# Allegro board newBoardNetEdit.brd
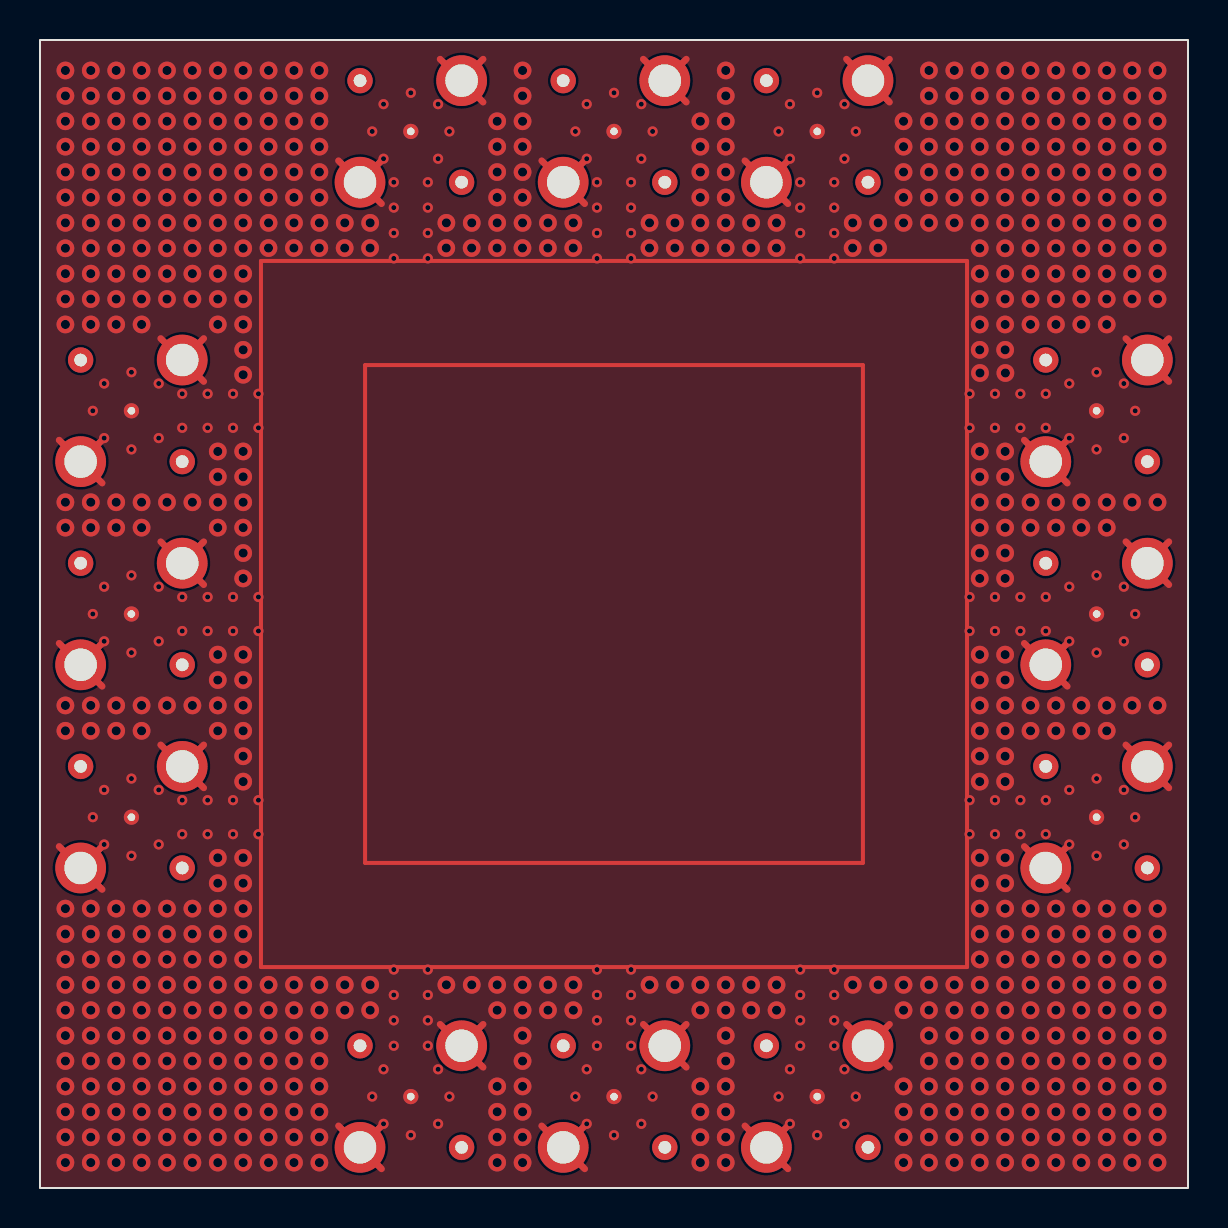
[diagram p0: board, top side]
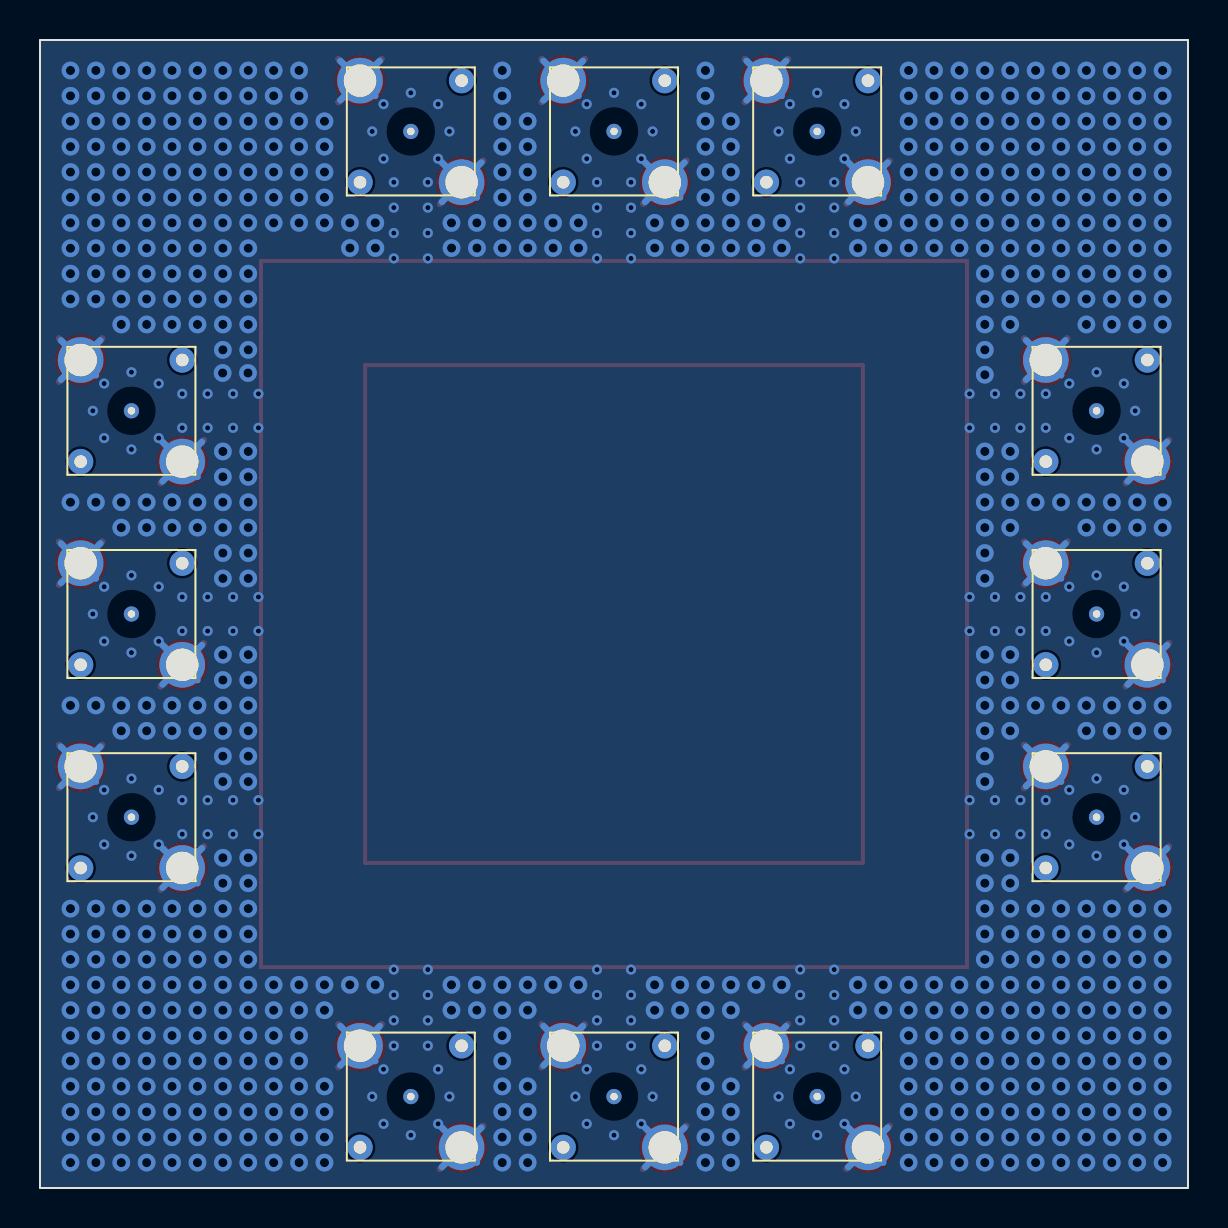
[diagram p1: board, bottom side, seen from below]

Outline 57.4 x 57.4 mm; copper layers: TOP, 02_GND, 03_SIG, BOTTOM. Coordinates in mm from the lower left corner of the outline.
Outline path: rectangle 0,0 57.4,57.4

## Placement (name value [footprint] x y rotation side)
J1  -  [SSMA_BB]  28.7 52.83 180 bottom
J2  -  [SSMA_BB]  38.86 52.83 180 bottom
J3  -  [SSMA_BB]  52.83 38.86 180 bottom
J4  -  [SSMA_BB]  52.83 28.7 180 bottom
J5  -  [SSMA_BB]  52.83 18.54 180 bottom
J6  -  [SSMA_BB]  38.86 4.57 180 bottom
J7  -  [SSMA_BB]  28.7 4.57 180 bottom
J8  -  [SSMA_BB]  18.54 4.57 180 bottom
J9  -  [SSMA_BB]  4.57 18.54 180 bottom
J10  -  [SSMA_BB]  4.57 28.7 180 bottom
J11  -  [SSMA_BB]  4.57 38.86 180 bottom
J12  -  [SSMA_BB]  18.54 52.83 180 bottom

## Library data of the parts
J1-J12 = SSMA_BB

## Footprints (pads in the part's own frame, mm; a bottom-side part is the same pattern mirrored in y, then rotated)
SSMA_BB
  round 1.27 hole 0.635: (-2.54,-2.54) (2.54,2.54)
  round 0.762 hole 0.381: 1(0,0)
  round 2.54 hole 1.626: 2(-2.54,2.54) 3(2.54,-2.54)

## Nets
GND: J1.2(TP-2) J1.3(TP-3) J2.2(TP-2) J2.3(TP-3) J3.2(TP-2) J3.3(TP-3) J4.2(TP-2) J4.3(TP-3) J5.2(TP-2) J5.3(TP-3) J6.2(TP-2) J6.3(TP-3) J7.2(TP-2) J7.3(TP-3) J8.2(TP-2) J8.3(TP-3) J9.2(TP-2) J9.3(TP-3) J10.2(TP-2) J10.3(TP-3) J11.2(TP-2) J11.3(TP-3) J12.2(TP-2) J12.3(TP-3)
MICROWAVE: J1.1(TP-1) J2.1(TP-1) J3.1(TP-1) J4.1(TP-1) J5.1(TP-1) J6.1(TP-1) J7.1(TP-1) J8.1(TP-1) J9.1(TP-1) J10.1(TP-1) J11.1(TP-1) J12.1(TP-1)

## Via types
v1: diameter 0.889, hole 0.457, TOP to BOTTOM, 633 vias
v2: diameter 0.508, hole 0.254, TOP to BOTTOM, 180 vias

## Routing (per net, layer and track width the routed paths; a pad name or vN(x,y) marks a point on that pad's centre or on a via; arc(x,y) is an arc through that point)
GND: length 387.6
  TOP w0.33: 54.61,20.32 J5.2 ; J5.2 56.45,20.01 ; J5.2 54.3,22.16 ; J5.2 56.45,22.16 ; 1.27,15.24 J9.3 ; J9.3 3.11,17.08 ; J9.3 3.11,14.93 ; J9.3 0.96,17.08 ; 56.45,32.32 J4.2 ; J4.2 54.61,30.48 ; J4.2 56.45,30.17 ; J4.2 54.3,32.32 ; 6.04,32.32 J10.2 ; J10.2 8.19,30.17 ; J10.2 6.35,30.48 ; J10.2 8.19,32.32 ; 15.24,1.27 J8.3 ; J8.3 14.93,3.11 ; J8.3 17.08,3.11 ; J8.3 17.08,0.96 ; 14.93,51.37 J12.3 ; J12.3 17.08,49.22 ; J12.3 15.24,49.53 ; J12.3 17.08,51.37 ; J3.3 51.37,35.25 ; J3.3 49.53,35.56 ; J3.3 51.37,37.4 ; J3.3 49.22,37.4 ; 30.17,56.45 J1.2 ; J1.2 30.48,54.61 ; J1.2 32.32,56.45 ; J1.2 32.32,54.3 ; 30.17,8.19 J7.2 ; J7.2 30.48,6.35 ; J7.2 32.32,6.04 ; J7.2 32.32,8.19 ; 8.19,42.48 J11.2 ; J11.2 6.04,42.48 ; J11.2 6.35,40.64 ; J11.2 8.19,40.33 ; 42.48,56.45 J2.2 ; J2.2 42.48,54.3 ; J2.2 40.33,56.45 ; J2.2 40.64,54.61 ; 27.24,3.11 J7.3 ; J7.3 25.4,1.27 ; J7.3 25.09,3.11 ; J7.3 27.24,0.96 ; 51.37,17.08 J5.3 ; J5.3 49.53,15.24 ; J5.3 49.22,17.08 ; J5.3 51.37,14.93 ; 6.35,20.32 J9.2 ; J9.2 8.19,20.01 ; J9.2 8.19,22.16 ; J9.2 6.04,22.16 ; 0.96,37.4 J11.3 ; J11.3 1.27,35.56 ; J11.3 3.11,35.25 ; J11.3 3.11,37.4 ; 35.25,3.11 J6.3 ; J6.3 37.4,3.11 ; J6.3 35.56,1.27 ; J6.3 37.4,0.96 ; 35.56,49.53 J2.3 ; J2.3 37.4,51.37 ; J2.3 37.4,49.22 ; J2.3 35.25,51.37 ; 20.32,54.61 J12.2 ; J12.2 20.01,56.45 ; J12.2 22.16,56.45 ; J12.2 22.16,54.3 ; 1.27,25.4 J10.3 ; J10.3 3.11,25.09 ; J10.3 3.11,27.24 ; J10.3 0.96,27.24 ; 20.01,8.19 J8.2 ; J8.2 22.16,6.04 ; J8.2 20.32,6.35 ; J8.2 22.16,8.19 ; 49.22,27.24 J4.3 ; J4.3 49.53,25.4 ; J4.3 51.37,25.09 ; J4.3 51.37,27.24 ; J6.2 42.48,6.04 ; J6.2 42.48,8.19 ; J6.2 40.33,8.19 ; J6.2 40.64,6.35 ; 54.3,42.48 J3.2 ; J3.2 54.61,40.64 ; J3.2 56.45,40.33 ; J3.2 56.45,42.48 ; 25.09,51.37 J1.3 ; J1.3 27.24,51.37 ; J1.3 25.4,49.53 ; J1.3 27.24,49.22
  03_SIG w0.33: J11.2 8.1,40.42 ; J11.2 6.13,42.39 ; J11.2 6.35,40.64 ; J11.2 8.1,42.39 ; 1.05,27.15 J10.3 ; J10.3 1.27,25.4 ; J10.3 3.02,27.15 ; J10.3 3.02,25.18 ; 54.61,40.64 J3.2 ; J3.2 56.36,40.42 ; J3.2 54.39,42.39 ; J3.2 56.36,42.39 ; 1.05,37.31 J11.3 ; J11.3 3.02,37.31 ; J11.3 3.02,35.34 ; J11.3 1.27,35.56 ; 6.35,30.48 J10.2 ; J10.2 8.1,30.26 ; J10.2 8.1,32.23 ; J10.2 6.13,32.23 ; 25.4,49.53 J1.3 ; J1.3 27.15,51.28 ; J1.3 25.18,51.28 ; J1.3 27.15,49.31 ; J1.2 32.23,54.39 ; J1.2 30.48,54.61 ; J1.2 30.26,56.36 ; J1.2 32.23,56.36 ; 30.48,6.35 J7.2 ; J7.2 30.26,8.1 ; J7.2 32.23,8.1 ; J7.2 32.23,6.13 ; 35.34,51.28 J2.3 ; J2.3 37.31,51.28 ; J2.3 37.31,49.31 ; J2.3 35.56,49.53 ; 15.02,51.28 J12.3 ; J12.3 15.24,49.53 ; J12.3 16.99,51.28 ; J12.3 16.99,49.31 ; 20.32,54.61 J12.2 ; J12.2 20.1,56.36 ; J12.2 22.07,54.39 ; J12.2 22.07,56.36 ; J6.3 37.31,1.05 ; J6.3 35.56,1.27 ; J6.3 35.34,3.02 ; J6.3 37.31,3.02 ; 54.39,22.07 J5.2 ; J5.2 54.61,20.32 ; J5.2 56.36,20.1 ; J5.2 56.36,22.07 ; 40.64,54.61 J2.2 ; J2.2 42.39,56.36 ; J2.2 42.39,54.39 ; J2.2 40.42,56.36 ; 8.1,22.07 J9.2 ; J9.2 6.13,22.07 ; J9.2 6.35,20.32 ; J9.2 8.1,20.1 ; J4.2 56.36,30.26 ; J4.2 54.61,30.48 ; J4.2 54.39,32.23 ; J4.2 56.36,32.23 ; 15.02,3.02 J8.3 ; J8.3 16.99,3.02 ; J8.3 16.99,1.05 ; J8.3 15.24,1.27 ; J6.2 42.39,6.13 ; J6.2 40.64,6.35 ; J6.2 40.42,8.1 ; J6.2 42.39,8.1 ; J5.3 51.28,15.02 ; J5.3 49.53,15.24 ; J5.3 49.31,16.99 ; J5.3 51.28,16.99 ; J4.3 51.28,25.18 ; J4.3 51.28,27.15 ; J4.3 49.31,27.15 ; J4.3 49.53,25.4 ; 22.07,8.1 J8.2 ; J8.2 22.07,6.13 ; J8.2 20.1,8.1 ; J8.2 20.32,6.35 ; 1.05,16.99 J9.3 ; J9.3 3.02,15.02 ; J9.3 3.02,16.99 ; J9.3 1.27,15.24 ; 51.28,37.31 J3.3 ; J3.3 51.28,35.34 ; J3.3 49.53,35.56 ; J3.3 49.31,37.31 ; 25.18,3.02 J7.3 ; J7.3 27.15,1.05 ; J7.3 25.4,1.27 ; J7.3 27.15,3.02
  BOTTOM w0.33: 54.61,30.48 J4.2 ; J4.2 56.36,32.23 ; J4.2 56.36,30.26 ; J4.2 54.39,32.23 ; 6.35,40.64 J11.2 ; J11.2 8.1,42.39 ; J11.2 8.1,40.42 ; J11.2 6.13,42.39 ; 49.53,25.4 J4.3 ; J4.3 51.28,25.18 ; J4.3 49.31,27.15 ; J4.3 51.28,27.15 ; 1.27,25.4 J10.3 ; J10.3 1.05,27.15 ; J10.3 3.02,25.18 ; J10.3 3.02,27.15 ; J11.3 3.02,35.34 ; J11.3 3.02,37.31 ; J11.3 1.27,35.56 ; J11.3 1.05,37.31 ; 6.35,20.32 J9.2 ; J9.2 8.1,20.1 ; J9.2 6.13,22.07 ; J9.2 8.1,22.07 ; 15.24,49.53 J12.3 ; J12.3 16.99,49.31 ; J12.3 16.99,51.28 ; J12.3 15.02,51.28 ; J10.2 8.1,30.26 ; J10.2 8.1,32.23 ; J10.2 6.13,32.23 ; J10.2 6.35,30.48 ; 42.39,8.1 J6.2 ; J6.2 40.64,6.35 ; J6.2 42.39,6.13 ; J6.2 40.42,8.1 ; J12.2 22.07,54.39 ; J12.2 20.32,54.61 ; J12.2 22.07,56.36 ; J12.2 20.1,56.36 ; 25.4,1.27 J7.3 ; J7.3 27.15,1.05 ; J7.3 25.18,3.02 ; J7.3 27.15,3.02 ; 49.31,37.31 J3.3 ; J3.3 49.53,35.56 ; J3.3 51.28,37.31 ; J3.3 51.28,35.34 ; 40.64,54.61 J2.2 ; J2.2 40.42,56.36 ; J2.2 42.39,56.36 ; J2.2 42.39,54.39 ; J2.3 37.31,49.31 ; J2.3 37.31,51.28 ; J2.3 35.56,49.53 ; J2.3 35.34,51.28 ; 49.31,16.99 J5.3 ; J5.3 51.28,15.02 ; J5.3 49.53,15.24 ; J5.3 51.28,16.99 ; J8.2 22.07,6.13 ; J8.2 22.07,8.1 ; J8.2 20.1,8.1 ; J8.2 20.32,6.35 ; J3.2 56.36,40.42 ; J3.2 54.61,40.64 ; J3.2 54.39,42.39 ; J3.2 56.36,42.39 ; 1.27,15.24 J9.3 ; J9.3 3.02,15.02 ; J9.3 1.05,16.99 ; J9.3 3.02,16.99 ; 37.31,3.02 J6.3 ; J6.3 37.31,1.05 ; J6.3 35.56,1.27 ; J6.3 35.34,3.02 ; 16.99,3.02 J8.3 ; J8.3 15.02,3.02 ; J8.3 15.24,1.27 ; J8.3 16.99,1.05 ; J5.2 56.36,20.1 ; J5.2 54.61,20.32 ; J5.2 54.39,22.07 ; J5.2 56.36,22.07 ; 30.26,8.1 J7.2 ; J7.2 32.23,6.13 ; J7.2 30.48,6.35 ; J7.2 32.23,8.1 ; 30.48,54.61 J1.2 ; J1.2 32.23,54.39 ; J1.2 30.26,56.36 ; J1.2 32.23,56.36 ; 25.4,49.53 J1.3 ; J1.3 25.18,51.28 ; J1.3 27.15,49.31 ; J1.3 27.15,51.28
  vias: v1(1.27,55.88) v1(1.27,54.61) v1(1.27,53.34) v1(1.27,52.07) v1(1.27,50.8) v1(1.27,49.53) v1(1.27,48.26) v1(1.27,46.99) v1(1.27,45.72) v1(1.27,44.45) v1(1.27,43.18) v1(1.27,34.29) v1(1.27,33.02) v1(1.27,24.13) v1(1.27,22.86) v1(1.27,13.97) v1(1.27,12.7) v1(1.27,11.43) v1(1.27,10.16) v1(1.27,8.89) v1(1.27,7.62) v1(1.27,6.35) v1(1.27,5.08) v1(1.27,3.81) v1(1.27,2.54) v1(1.27,1.27) v1(2.54,55.88) v1(2.54,54.61) v1(2.54,53.34) v1(2.54,52.07) v1(2.54,50.8) v1(2.54,49.53) v1(2.54,48.26) v1(2.54,46.99) v1(2.54,45.72) v1(2.54,44.45) v1(2.54,43.18) v1(2.54,34.29) v1(2.54,33.02) v1(2.54,24.13) v1(2.54,22.86) v1(2.54,13.97) v1(2.54,12.7) v1(2.54,11.43) v1(2.54,10.16) v1(2.54,8.89) v1(2.54,7.62) v1(2.54,6.35) v1(2.54,5.08) v1(2.54,3.81) v1(2.54,2.54) v1(2.54,1.27) v1(3.81,55.88) v1(3.81,54.61) v1(3.81,53.34) v1(3.81,52.07) v1(3.81,50.8) v1(3.81,49.53) v1(3.81,48.26) v1(3.81,46.99) v1(3.81,45.72) v1(3.81,44.45) v1(3.81,43.18) v1(3.81,34.29) v1(3.81,33.02) v1(3.81,24.13) v1(3.81,22.86) v1(3.81,13.97) v1(3.81,12.7) v1(3.81,11.43) v1(3.81,10.16) v1(3.81,8.89) v1(3.81,7.62) v1(3.81,6.35) v1(3.81,5.08) v1(3.81,3.81) v1(3.81,2.54) v1(3.81,1.27) v1(5.08,55.88) v1(5.08,54.61) v1(5.08,53.34) v1(5.08,52.07) v1(5.08,50.8) v1(5.08,49.53) v1(5.08,48.26) v1(5.08,46.99) v1(5.08,45.72) v1(5.08,44.45) v1(5.08,43.18) v1(5.08,34.29) v1(5.08,33.02) v1(5.08,24.13) v1(5.08,22.86) v1(5.08,13.97) v1(5.08,12.7) v1(5.08,11.43) v1(5.08,10.16) v1(5.08,8.89) v1(5.08,7.62) v1(5.08,6.35) v1(5.08,5.08) v1(5.08,3.81) v1(5.08,2.54) v1(5.08,1.27) v1(6.35,55.88) v1(6.35,54.61) v1(6.35,53.34) v1(6.35,52.07) v1(6.35,50.8) v1(6.35,49.53) v1(6.35,48.26) v1(6.35,46.99) v1(6.35,45.72) v1(6.35,44.45) v1(6.35,34.29) v1(6.35,24.13) v1(6.35,13.97) v1(6.35,12.7) v1(6.35,11.43) v1(6.35,10.16) v1(6.35,8.89) v1(6.35,7.62) v1(6.35,6.35) v1(6.35,5.08) v1(6.35,3.81) v1(6.35,2.54) v1(6.35,1.27) v1(7.62,55.88) v1(7.62,54.61) v1(7.62,53.34) v1(7.62,52.07) v1(7.62,50.8) v1(7.62,49.53) v1(7.62,48.26) v1(7.62,46.99) v1(7.62,45.72) v1(7.62,44.45) v1(7.62,34.29) v1(7.62,24.13) v1(7.62,13.97) v1(7.62,12.7) v1(7.62,11.43) v1(7.62,10.16) v1(7.62,8.89) v1(7.62,7.62) v1(7.62,6.35) v1(7.62,5.08) v1(7.62,3.81) v1(7.62,2.54) v1(7.62,1.27) v1(8.89,55.88) v1(8.89,54.61) v1(8.89,53.34) v1(8.89,52.07) v1(8.89,50.8) v1(8.89,49.53) v1(8.89,48.26) v1(8.89,46.99) v1(8.89,45.72) v1(8.89,44.45) v1(8.89,43.18) v1(8.89,36.83) v1(8.89,35.56) v1(8.89,34.29) v1(8.89,33.02) v1(8.89,26.67) v1(8.89,25.4) v1(8.89,24.13) v1(8.89,22.86) v1(8.89,16.51) v1(8.89,15.24) v1(8.89,13.97) v1(8.89,12.7) v1(8.89,11.43) v1(8.89,10.16) v1(8.89,8.89) v1(8.89,7.62) v1(8.89,6.35) v1(8.89,5.08) v1(8.89,3.81) v1(8.89,2.54) v1(8.89,1.27) v1(10.16,55.88) v1(10.16,54.61) v1(10.16,53.34) v1(10.16,52.07) v1(10.16,50.8) v1(10.16,49.53) v1(10.16,48.26) v1(10.16,46.99) v1(10.16,45.72) v1(10.16,44.45) v1(10.16,43.18) v1(10.16,41.91) v1(10.16,40.67) v1(10.16,36.83) v1(10.16,35.56) v1(10.16,34.29) v1(10.16,33.02) v1(10.16,31.75) v1(10.16,30.48) v1(10.16,26.67) v1(10.16,25.4) v1(10.16,24.13) v1(10.16,22.86) v1(10.16,21.59) v1(10.16,20.32) v1(10.16,16.51) v1(10.16,15.24) v1(10.16,13.97) v1(10.16,12.7) v1(10.16,11.43) v1(10.16,10.16) v1(10.16,8.89) v1(10.16,7.62) v1(10.16,6.35) v1(10.16,5.08) v1(10.16,3.81) v1(10.16,2.54) v1(10.16,1.27) v1(11.43,55.88) v1(11.43,54.61) v1(11.43,53.34) v1(11.43,52.07) v1(11.43,50.8) v1(11.43,49.53) v1(11.43,48.26) v1(11.42,47) v1(11.43,10.16) v1(11.43,8.89) v1(11.43,7.62) v1(11.43,6.35) v1(11.43,5.08) v1(11.43,3.81) v1(11.43,2.54) v1(11.43,1.27) v1(12.7,55.88) v1(12.7,54.61) v1(12.7,53.34) v1(12.7,52.07) v1(12.7,50.8) v1(12.7,49.53) v1(12.7,48.26) v1(12.69,47) v1(12.7,10.16) v1(12.7,8.89) v1(12.7,7.62) v1(12.7,6.35) v1(12.7,5.08) v1(12.7,3.81) v1(12.7,2.54) v1(12.7,1.27) v1(13.97,55.88) v1(13.97,54.61) v1(13.97,53.34) v1(13.97,52.07) v1(13.97,50.8) v1(13.97,49.53) v1(13.97,48.26) v1(13.96,47) v1(13.97,10.16) v1(13.97,8.89) v1(13.97,7.62) v1(13.97,6.35) v1(13.97,5.08) v1(13.97,3.81) v1(13.97,2.54) v1(13.97,1.27) v1(15.24,48.26) v1(15.23,47) v1(15.24,10.16) v1(15.24,8.89) v1(16.51,48.26) v1(16.5,47) v1(16.51,10.16) v1(16.51,8.89) v1(20.32,48.26) v1(20.31,47) v1(20.32,10.16) v1(21.59,48.26) v1(21.58,47) v1(21.59,10.16) v1(22.86,53.34) v1(22.86,52.07) v1(22.86,50.8) v1(22.86,49.53) v1(22.86,48.26) v1(22.85,47) v1(22.86,10.16) v1(22.86,8.89) v1(22.86,5.08) v1(22.86,3.81) v1(22.86,2.54) v1(22.86,1.27) v1(24.13,55.88) v1(24.13,54.61) v1(24.13,53.34) v1(24.13,52.07) v1(24.13,50.8) v1(24.13,49.53) v1(24.13,48.26) v1(24.12,47) v1(24.13,10.16) v1(24.13,8.89) v1(24.13,7.62) v1(24.13,6.35) v1(24.13,5.08) v1(24.13,3.81) v1(24.13,2.54) v1(24.13,1.27) v1(25.4,48.26) v1(25.39,47) v1(25.4,10.16) v1(25.4,8.89) v1(26.67,48.26) v1(26.66,47) v1(26.67,10.16) v1(26.67,8.89) v1(30.48,48.26) v1(30.47,47) v1(30.48,10.16) v1(31.75,48.26) v1(31.74,47) v1(31.75,10.16) v1(33.02,53.34) v1(33.02,52.07) v1(33.02,50.8) v1(33.02,49.53) v1(33.02,48.26) v1(33.01,47) v1(33.02,10.16) v1(33.02,8.89) v1(33.02,5.08) v1(33.02,3.81) v1(33.02,2.54) v1(33.02,1.27) v1(34.29,55.88) v1(34.29,54.61) v1(34.29,53.34) v1(34.29,52.07) v1(34.29,50.8) v1(34.29,49.53) v1(34.29,48.26) v1(34.28,47) v1(34.29,10.16) v1(34.29,8.89) v1(34.29,7.62) v1(34.29,6.35) v1(34.29,5.08) v1(34.29,3.81) v1(34.29,2.54) v1(34.29,1.27) v1(35.56,48.26) v1(35.55,47) v1(35.56,10.16) v1(35.56,8.89) v1(36.83,48.26) v1(36.82,47) v1(36.83,10.16) v1(36.83,8.89) v1(40.64,48.26) v1(40.63,47) v1(40.64,10.16) v1(41.91,48.26) v1(41.9,47) v1(41.91,10.16) v1(43.18,53.34) v1(43.18,52.07) v1(43.18,50.8) v1(43.18,49.53) v1(43.18,48.26) v1(43.18,10.16) v1(43.18,8.89) v1(43.18,5.08) v1(43.18,3.81) v1(43.18,2.54) v1(43.18,1.27) v1(44.45,55.88) v1(44.45,54.61) v1(44.45,53.34) v1(44.45,52.07) v1(44.45,50.8) v1(44.45,49.53) v1(44.45,48.26) v1(44.45,10.16) v1(44.45,8.89) v1(44.45,7.62) v1(44.45,6.35) v1(44.45,5.08) v1(44.45,3.81) v1(44.45,2.54) v1(44.45,1.27) v1(45.72,55.88) v1(45.72,54.61) v1(45.72,53.34) v1(45.72,52.07) v1(45.72,50.8) v1(45.72,49.53) v1(45.72,48.26) v1(45.72,10.16) v1(45.72,8.89) v1(45.72,7.62) v1(45.72,6.35) v1(45.72,5.08) v1(45.72,3.81) v1(45.72,2.54) v1(45.72,1.27) v1(46.99,55.88) v1(46.99,54.61) v1(46.99,53.34) v1(46.99,52.07) v1(46.99,50.8) v1(46.99,49.53) v1(46.99,48.26) v1(46.99,46.99) v1(46.99,45.72) v1(46.99,44.45) v1(46.99,43.18) v1(46.99,41.91) v1(47,40.75) v1(46.99,36.83) v1(46.99,35.56) v1(46.99,34.29) v1(46.99,33.02) v1(46.99,31.75) v1(46.99,30.48) v1(46.99,26.67) v1(46.99,25.4) v1(46.99,24.13) v1(46.99,22.86) v1(46.99,21.59) v1(46.99,20.32) v1(46.99,16.51) v1(46.99,15.24) v1(46.99,13.97) v1(46.99,12.7) v1(46.99,11.43) v1(46.99,10.16) v1(46.99,8.89) v1(46.99,7.62) v1(46.99,6.35) v1(46.99,5.08) v1(46.99,3.81) v1(46.99,2.54) v1(46.99,1.27) v1(48.26,55.88) v1(48.26,54.61) v1(48.26,53.34) v1(48.26,52.07) v1(48.26,50.8) v1(48.26,49.53) v1(48.26,48.26) v1(48.26,46.99) v1(48.26,45.72) v1(48.26,44.45) v1(48.26,43.18) v1(48.26,41.91) v1(48.27,40.75) v1(48.26,36.83) v1(48.26,35.56) v1(48.26,34.29) v1(48.26,33.02) v1(48.26,31.75) v1(48.26,30.48) v1(48.26,26.67) v1(48.26,25.4) v1(48.26,24.13) v1(48.26,22.86) v1(48.26,21.59) v1(48.26,20.32) v1(48.26,16.51) v1(48.26,15.24) v1(48.26,13.97) v1(48.26,12.7) v1(48.26,11.43) v1(48.26,10.16) v1(48.26,8.89) v1(48.26,7.62) v1(48.26,6.35) v1(48.26,5.08) v1(48.26,3.81) v1(48.26,2.54) v1(48.26,1.27) v1(49.53,55.88) v1(49.53,54.61) v1(49.53,53.34) v1(49.53,52.07) v1(49.53,50.8) v1(49.53,49.53) v1(49.53,48.26) v1(49.53,46.99) v1(49.53,45.72) v1(49.53,44.45) v1(49.53,43.18) v1(49.53,34.29) v1(49.53,33.02) v1(49.53,24.13) v1(49.53,22.86) v1(49.53,13.97) v1(49.53,12.7) v1(49.53,11.43) v1(49.53,10.16) v1(49.53,8.89) v1(49.53,7.62) v1(49.53,6.35) v1(49.53,5.08) v1(49.53,3.81) v1(49.53,2.54) v1(49.53,1.27) v1(50.8,55.88) v1(50.8,54.61) v1(50.8,53.34) v1(50.8,52.07) v1(50.8,50.8) v1(50.8,49.53) v1(50.8,48.26) v1(50.8,46.99) v1(50.8,45.72) v1(50.8,44.45) v1(50.8,43.18) v1(50.8,34.29) v1(50.8,33.02) v1(50.8,24.13) v1(50.8,22.86) v1(50.8,13.97) v1(50.8,12.7) v1(50.8,11.43) v1(50.8,10.16) v1(50.8,8.89) v1(50.8,7.62) v1(50.8,6.35) v1(50.8,5.08) v1(50.8,3.81) v1(50.8,2.54) v1(50.8,1.27) v1(52.07,55.88) v1(52.07,54.61) v1(52.07,53.34) v1(52.07,52.07) v1(52.07,50.8) v1(52.07,49.53) v1(52.07,48.26) v1(52.07,46.99) v1(52.07,45.72) v1(52.07,44.45) v1(52.07,43.18) v1(52.07,34.29) v1(52.07,33.02) v1(52.07,24.13) v1(52.07,22.86) v1(52.07,13.97) v1(52.07,12.7) v1(52.07,11.43) v1(52.07,10.16) v1(52.07,8.89) v1(52.07,7.62) v1(52.07,6.35) v1(52.07,5.08) v1(52.07,3.81) v1(52.07,2.54) v1(52.07,1.27) v1(53.34,55.88) v1(53.34,54.61) v1(53.34,53.34) v1(53.34,52.07) v1(53.34,50.8) v1(53.34,49.53) v1(53.34,48.26) v1(53.34,46.99) v1(53.34,45.72) v1(53.34,44.45) v1(53.34,43.18) v1(53.34,34.29) v1(53.34,33.02) v1(53.34,24.13) v1(53.34,22.86) v1(53.34,13.97) v1(53.34,12.7) v1(53.34,11.43) v1(53.34,10.16) v1(53.34,8.89) v1(53.34,7.62) v1(53.34,6.35) v1(53.34,5.08) v1(53.34,3.81) v1(53.34,2.54) v1(53.34,1.27) v1(54.61,55.88) v1(54.61,54.61) v1(54.61,53.34) v1(54.61,52.07) v1(54.61,50.8) v1(54.61,49.53) v1(54.61,48.26) v1(54.61,46.99) v1(54.61,45.72) v1(54.61,44.45) v1(54.61,34.29) v1(54.61,24.13) v1(54.61,13.97) v1(54.61,12.7) v1(54.61,11.43) v1(54.61,10.16) v1(54.61,8.89) v1(54.61,7.62) v1(54.61,6.35) v1(54.61,5.08) v1(54.61,3.81) v1(54.61,2.54) v1(54.61,1.27) v1(55.88,55.88) v1(55.88,54.61) v1(55.88,53.34) v1(55.88,52.07) v1(55.88,50.8) v1(55.88,49.53) v1(55.88,48.26) v1(55.88,46.99) v1(55.88,45.72) v1(55.88,44.45) v1(55.88,34.29) v1(55.88,24.13) v1(55.88,13.97) v1(55.88,12.7) v1(55.88,11.43) v1(55.88,10.16) v1(55.88,8.89) v1(55.88,7.62) v1(55.88,6.35) v1(55.88,5.08) v1(55.88,3.81) v1(55.88,2.54) v1(55.88,1.27) v2(2.64,38.86) v2(2.64,28.7) v2(2.64,18.54) v2(3.21,40.23) v2(3.21,37.5) v2(3.21,30.07) v2(3.21,27.34) v2(3.21,19.91) v2(3.21,17.18) v2(4.57,40.79) v2(4.57,36.93) v2(4.57,30.63) v2(4.57,26.77) v2(4.57,20.47) v2(4.57,16.61) v2(5.94,40.23) v2(5.94,37.5) v2(5.94,30.07) v2(5.94,27.34) v2(5.94,19.91) v2(5.94,17.18) v2(7.11,39.71) v2(7.11,38.01) v2(7.11,29.55) v2(7.11,27.85) v2(7.11,19.39) v2(7.11,17.69) v2(8.38,39.71) v2(8.38,38.01) v2(8.38,29.55) v2(8.38,27.85) v2(8.38,19.39) v2(8.38,17.69) v2(9.65,39.71) v2(9.65,38.01) v2(9.65,29.55) v2(9.65,27.85) v2(9.65,19.39) v2(9.65,17.69) v2(10.92,39.71) v2(10.92,38.01) v2(10.92,29.55) v2(10.92,27.85) v2(10.92,19.39) v2(10.92,17.69) v2(16.61,52.83) v2(16.61,4.57) v2(17.18,54.2) v2(17.18,51.47) v2(17.18,5.94) v2(17.18,3.21) v2(17.69,50.29) v2(17.69,49.02) v2(17.69,47.75) v2(17.69,46.48) v2(17.69,10.92) v2(17.69,9.65) v2(17.69,8.38) v2(17.69,7.11) v2(18.54,54.76) v2(18.54,2.64) v2(19.39,50.29) v2(19.39,49.02) v2(19.39,47.75) v2(19.39,46.48) v2(19.39,10.92) v2(19.39,9.65) v2(19.39,8.38) v2(19.39,7.11) v2(19.91,54.2) v2(19.91,51.47) v2(19.91,5.94) v2(19.91,3.21) v2(20.47,52.83) v2(20.47,4.57) v2(26.77,52.83) v2(26.77,4.57) v2(27.34,54.2) v2(27.34,51.47) v2(27.34,5.94) v2(27.34,3.21) v2(27.85,50.29) v2(27.85,49.02) v2(27.85,47.75) v2(27.85,46.48) v2(27.85,10.92) v2(27.85,9.65) v2(27.85,8.38) v2(27.85,7.11) v2(28.7,54.76) v2(28.7,2.64) v2(29.55,50.29) v2(29.55,49.02) v2(29.55,47.75) v2(29.55,46.48) v2(29.55,10.92) v2(29.55,9.65) v2(29.55,8.38) v2(29.55,7.11) v2(30.07,54.2) v2(30.07,51.47) v2(30.07,5.94) v2(30.07,3.21) v2(30.63,52.83) v2(30.63,4.57) v2(36.93,52.83) v2(36.93,4.57) v2(37.5,54.2) v2(37.5,51.47) v2(37.5,5.94) v2(37.5,3.21) v2(38.01,50.29) v2(38.01,49.02) v2(38.01,47.75) v2(38.01,46.48) v2(38.01,10.92) v2(38.01,9.65) v2(38.01,8.38) v2(38.01,7.11) v2(38.86,54.76) v2(38.86,2.64) v2(39.71,50.29) v2(39.71,49.02) v2(39.71,47.75) v2(39.71,46.48) v2(39.71,10.92) v2(39.71,9.65) v2(39.71,8.38) v2(39.71,7.11) v2(40.23,54.2) v2(40.23,51.47) v2(40.23,5.94) v2(40.23,3.21) v2(40.79,52.83) v2(40.79,4.57) v2(46.48,39.71) v2(46.48,38.01) v2(46.48,29.55) v2(46.48,27.85) v2(46.48,19.39) v2(46.48,17.69) v2(47.75,39.71) v2(47.75,38.01) v2(47.75,29.55) v2(47.75,27.85) v2(47.75,19.39) v2(47.75,17.69) v2(49.02,39.71) v2(49.02,38.01) v2(49.02,29.55) v2(49.02,27.85) v2(49.02,19.39) v2(49.02,17.69) v2(50.29,39.71) v2(50.29,38.01) v2(50.29,29.55) v2(50.29,27.85) v2(50.29,19.39) v2(50.29,17.69) v2(51.47,40.23) v2(51.47,37.5) v2(51.47,30.07) v2(51.47,27.34) v2(51.47,19.91) v2(51.47,17.18) v2(52.83,40.79) v2(52.83,36.93) v2(52.83,30.63) v2(52.83,26.77) v2(52.83,20.47) v2(52.83,16.61) v2(54.2,40.23) v2(54.2,37.5) v2(54.2,30.07) v2(54.2,27.34) v2(54.2,19.91) v2(54.2,17.18) v2(54.76,38.86) v2(54.76,28.7) v2(54.76,18.54)
MICROWAVE: length 289.6
  03_SIG w0.33: J8.1 J12.1 ; J9.1 J5.1 ; J1.1 J7.1 ; J10.1 J4.1 ; J2.1 J6.1 ; J11.1 J3.1

## Copper pours and planes (outline as drawn; the poured copper is in the pictures)
GND on TOP, BOTTOM, 02_GND, 03_SIG: 0,0 57.4,0 57.4,57.4 0,57.4
